# Altium PCB PCMCIA Type 2 Un-Shielded 15 Pin IO Connector(3).PCBDOC
Units mil, origin at the board's own origin, x right, y up, seen from the top; angles counter-clockwise.
Board outline 3047 x 1827 mil, 10 copper layers (TopLayer, MidLayer1, MidLayer2, MidLayer3, MidLayer4, MidLayer5, MidLayer6, MidLayer7, MidLayer8, BottomLayer); 2 components, 0 nets, 85 pads, 0 vias.
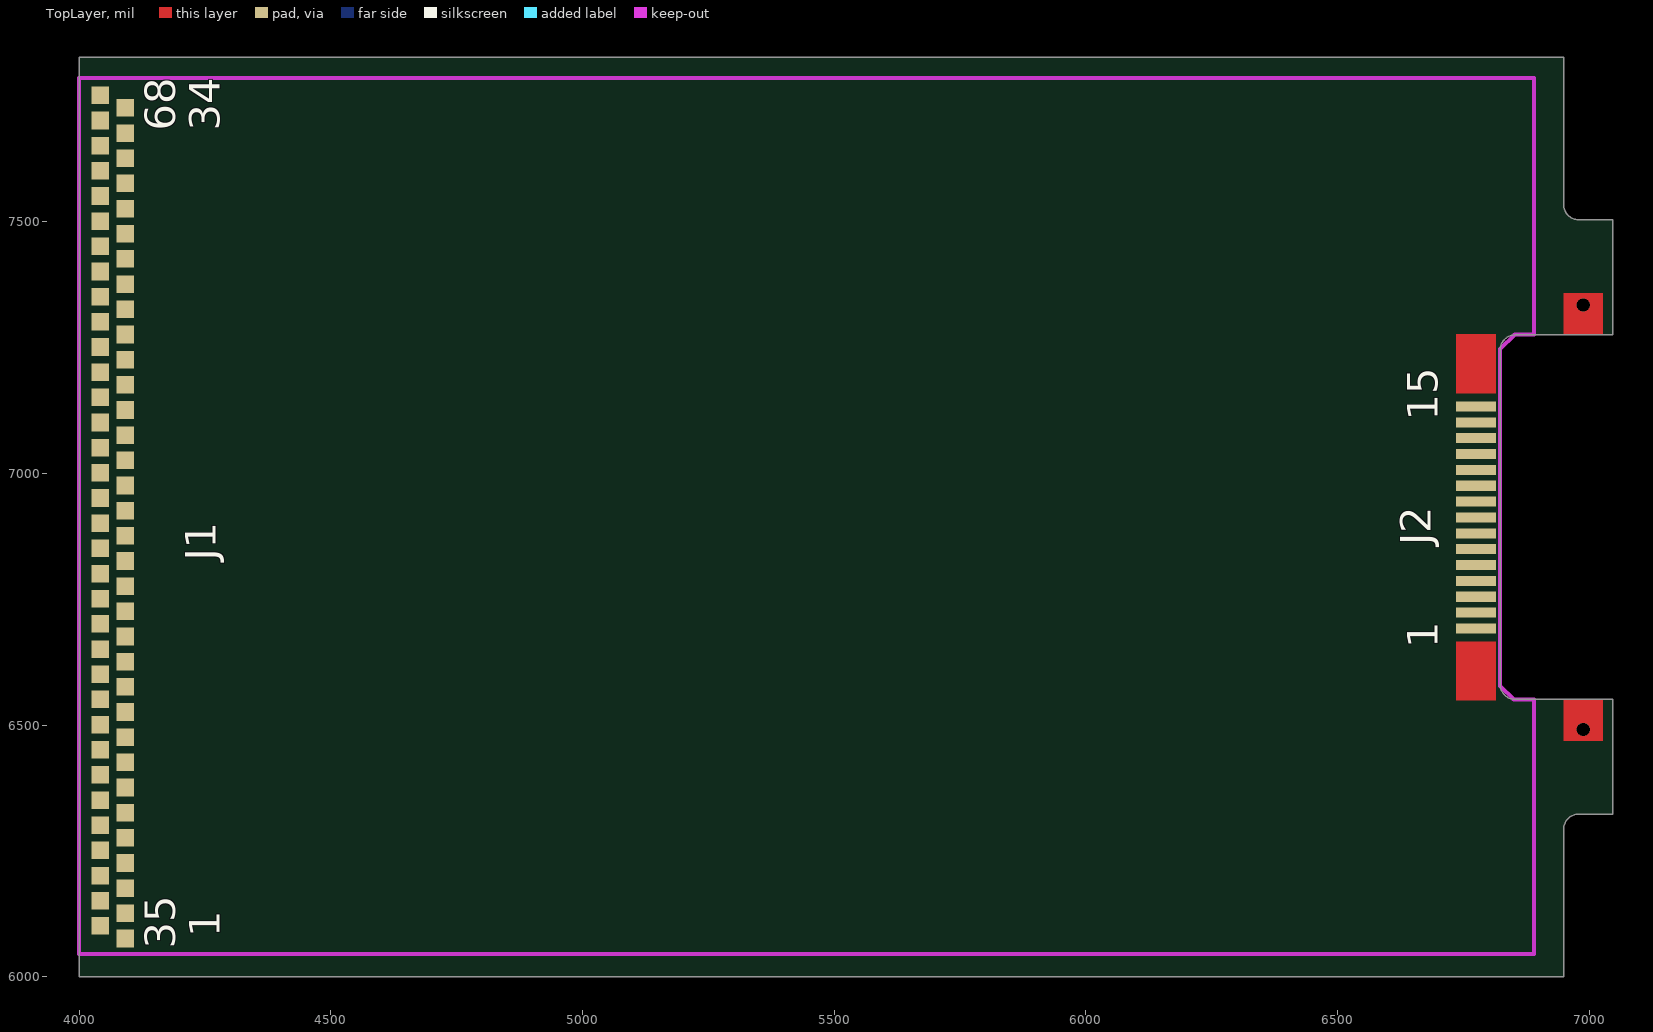
[diagram p0: TopLayer view]
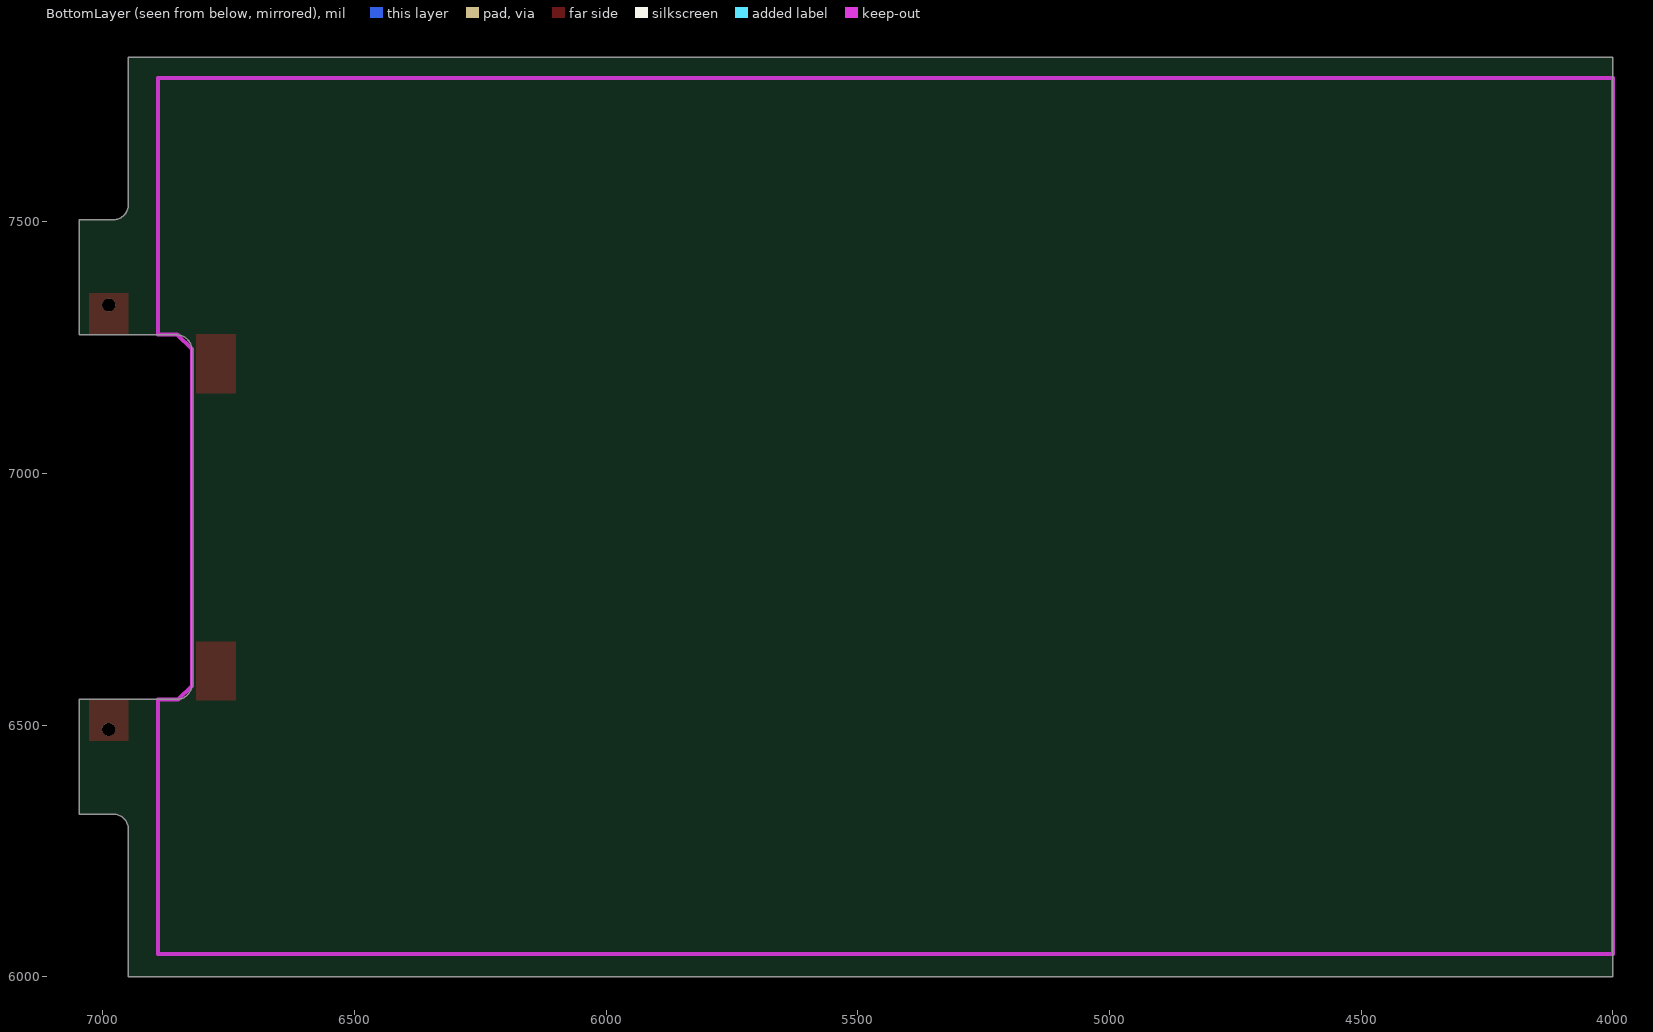
[diagram p1: BottomLayer view, seen from below]
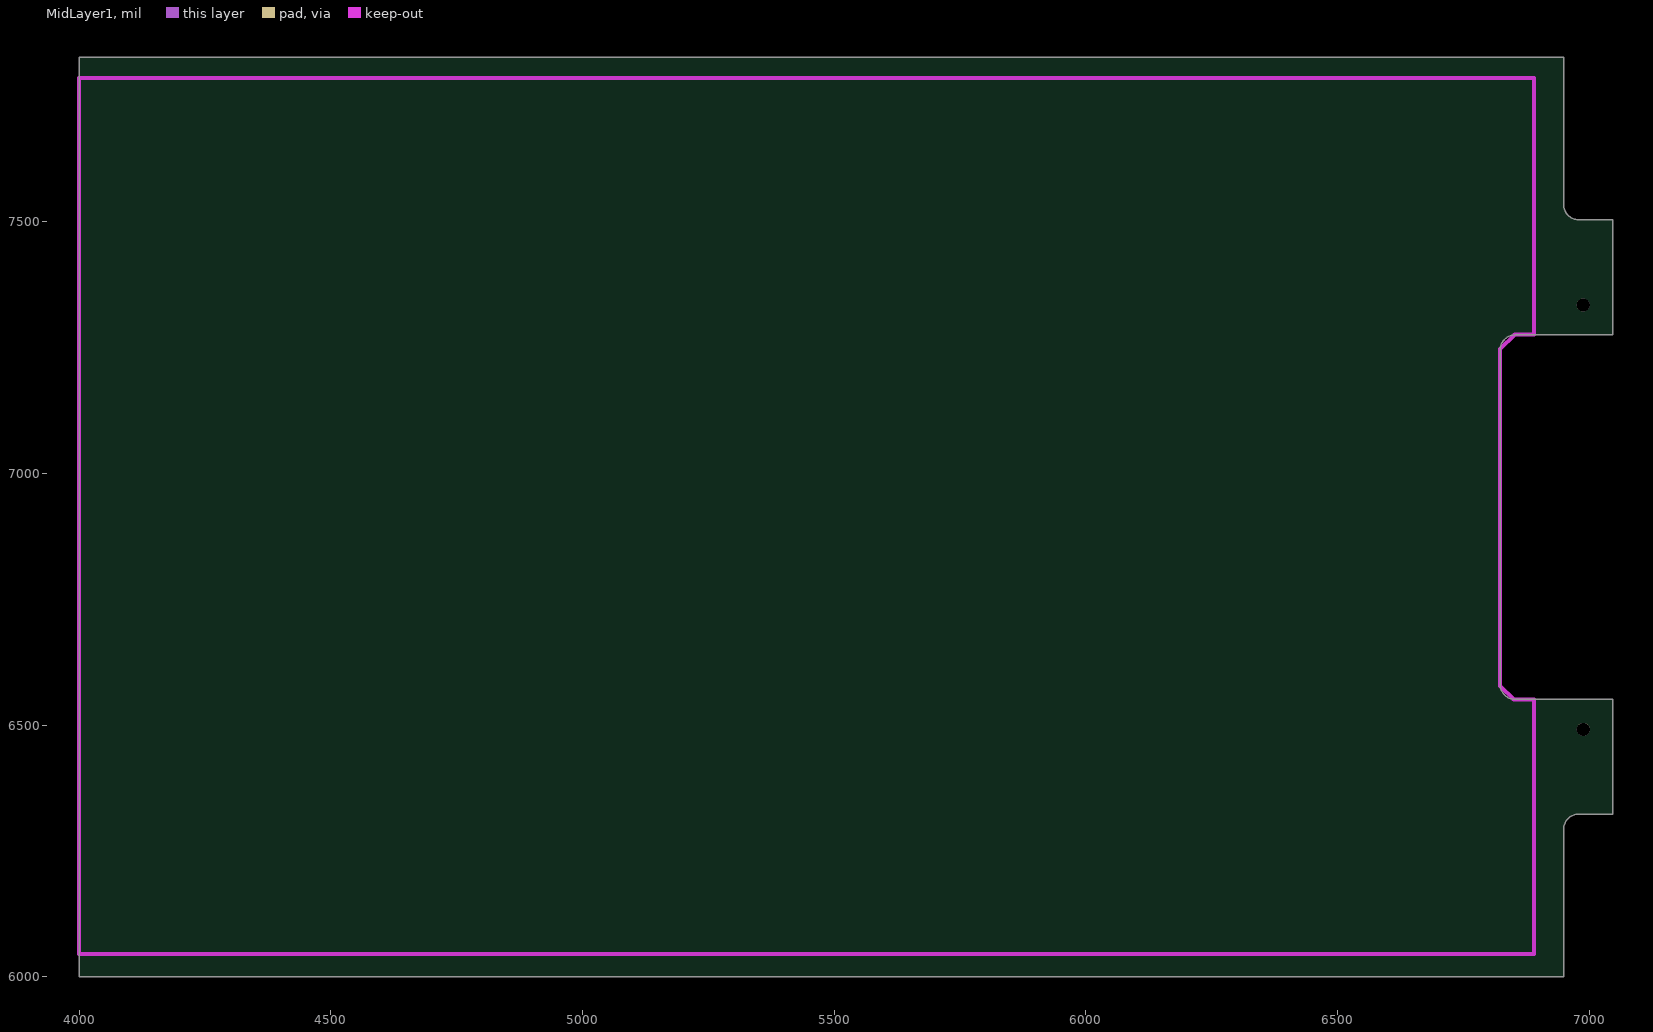
[diagram p2: MidLayer1]
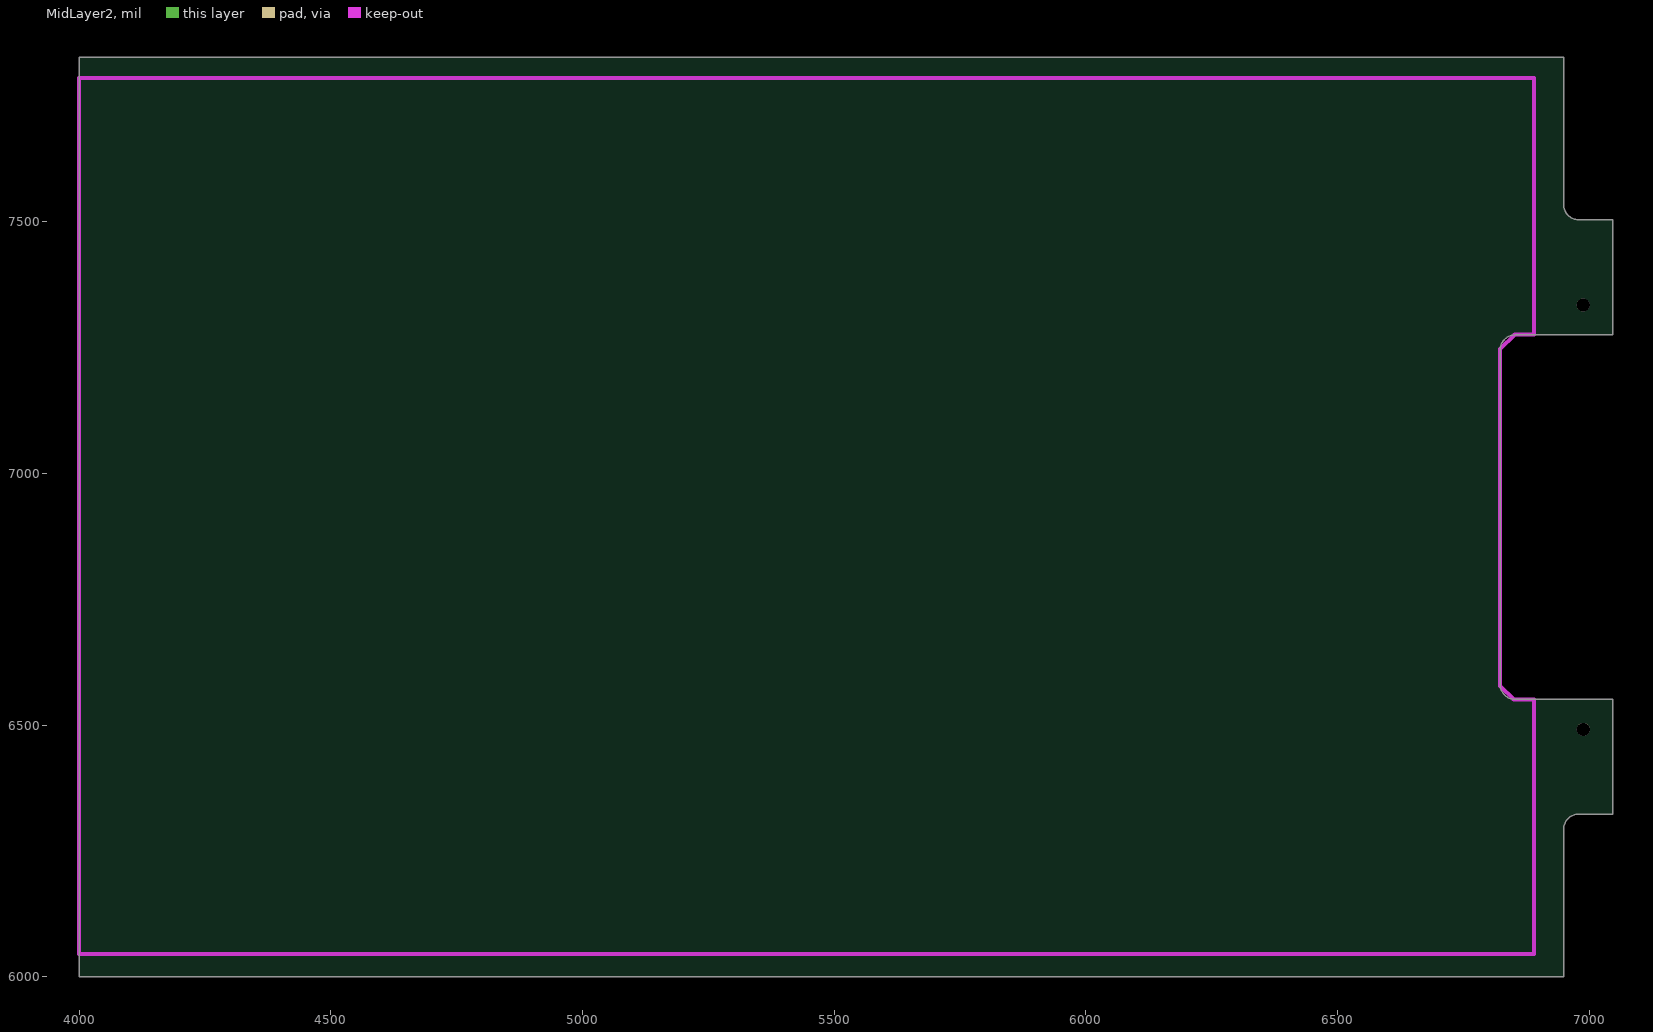
[diagram p3: MidLayer2]
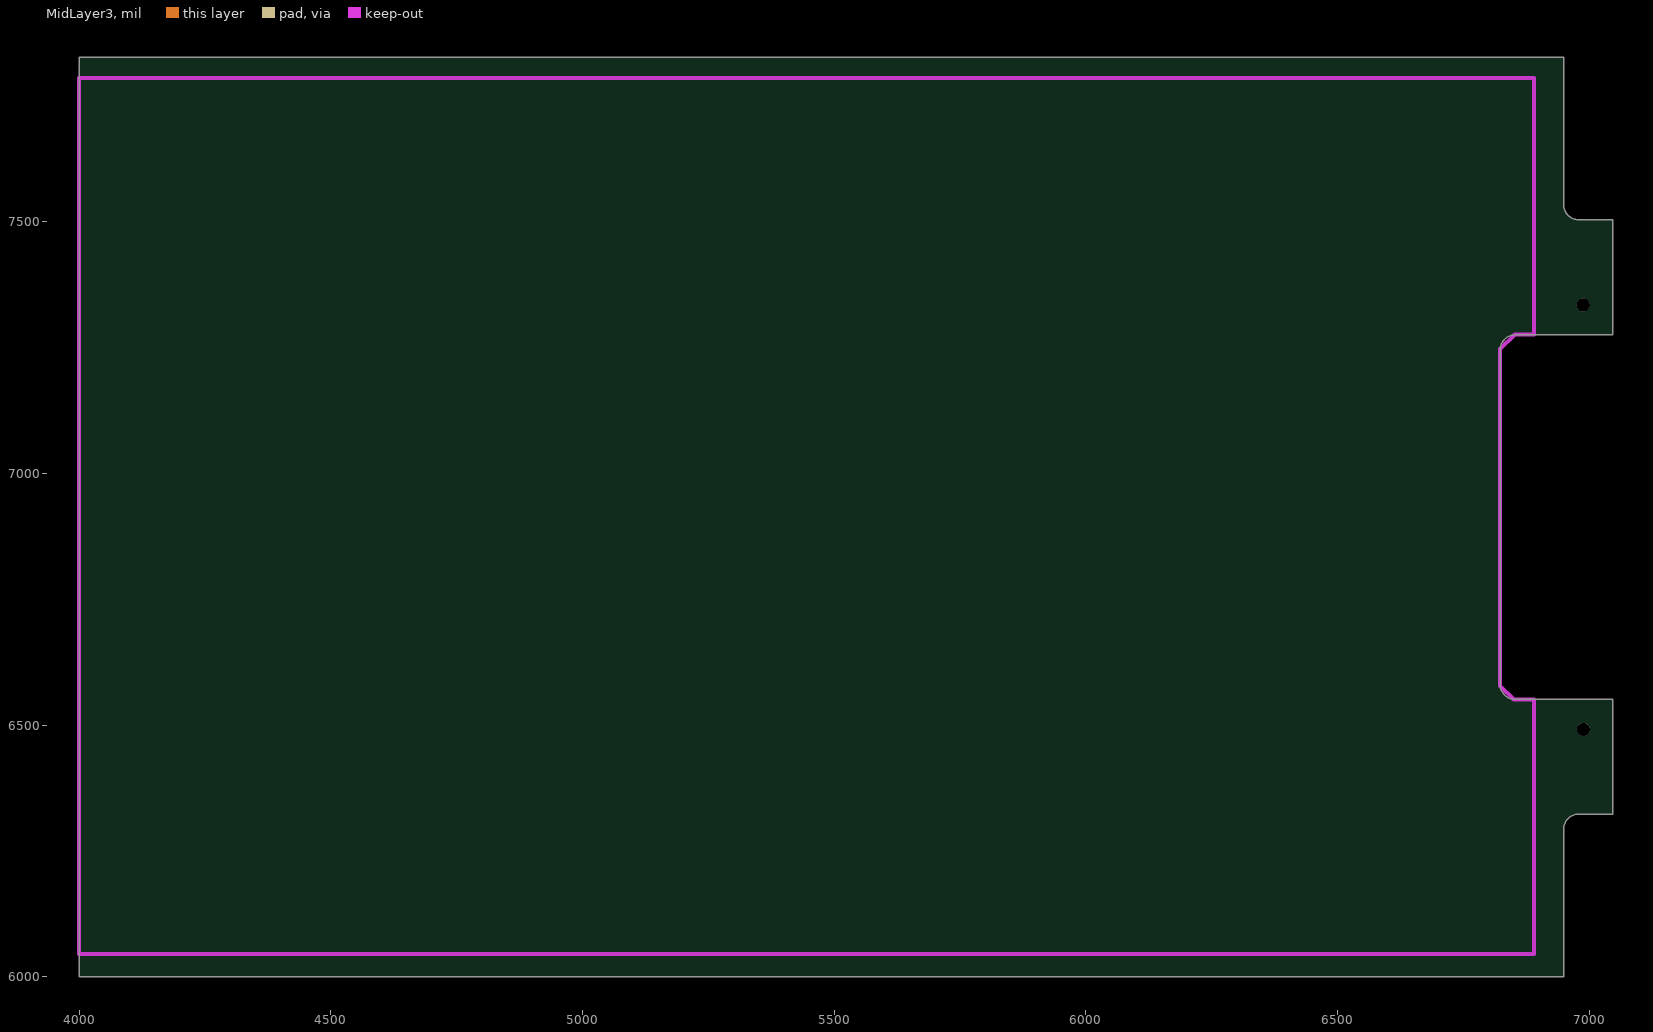
[diagram p4: MidLayer3]
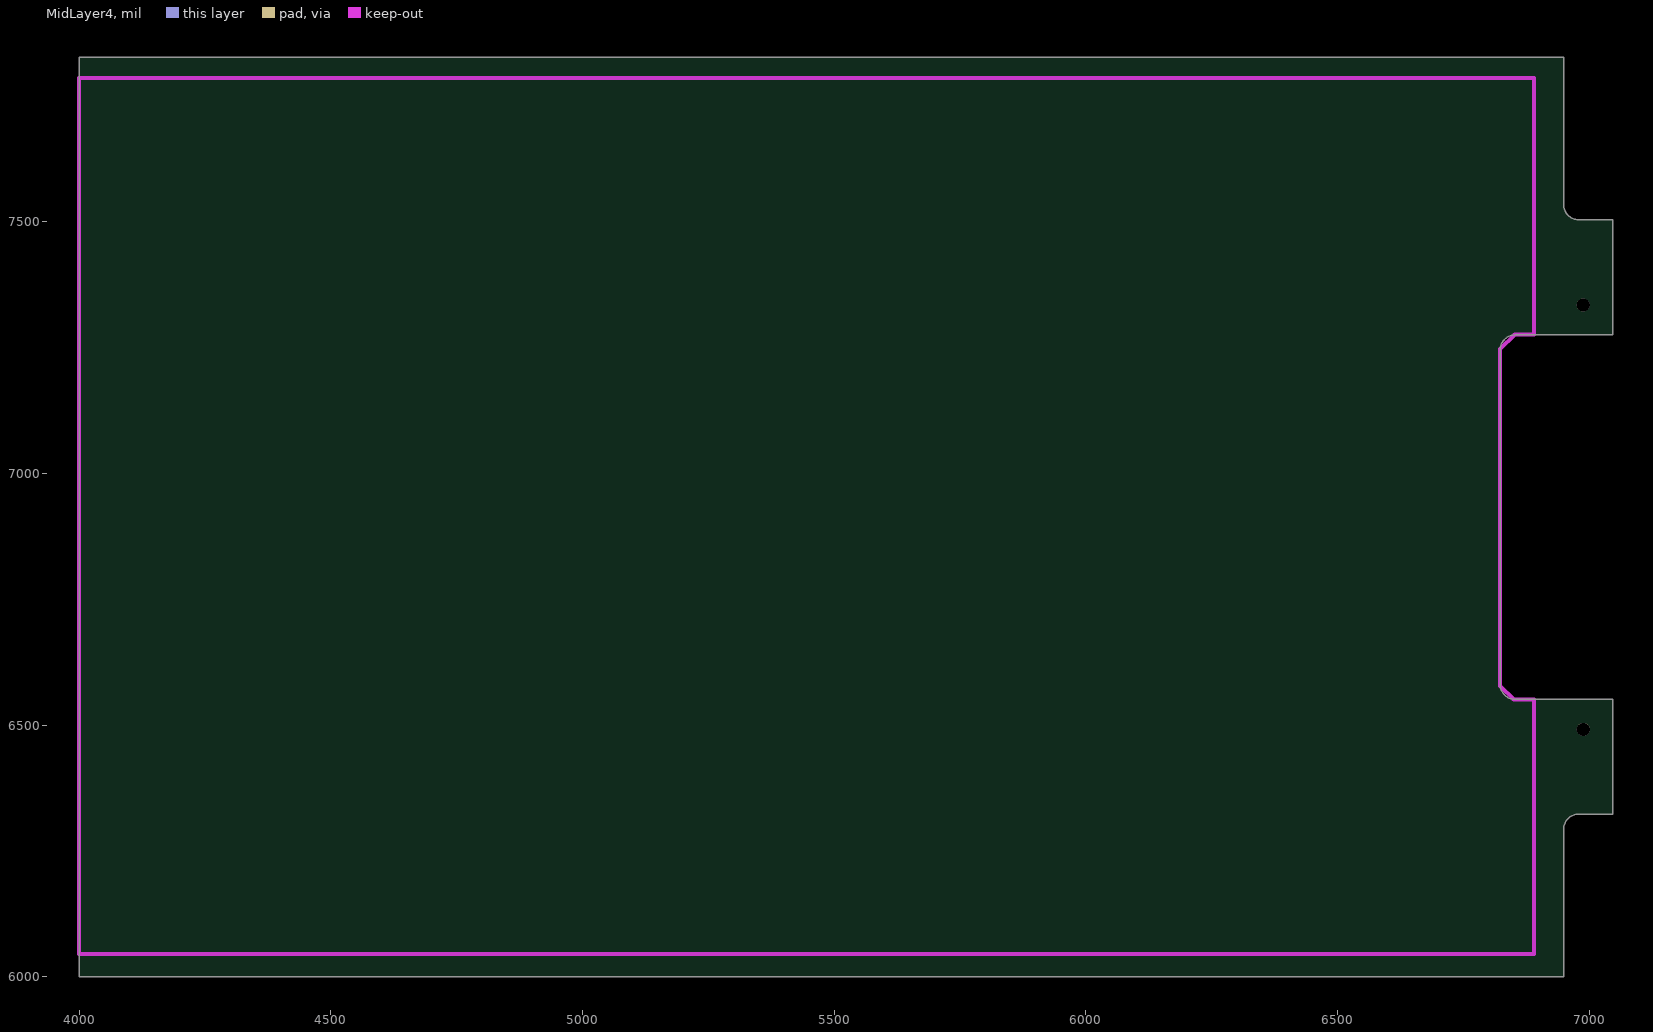
[diagram p5: MidLayer4]
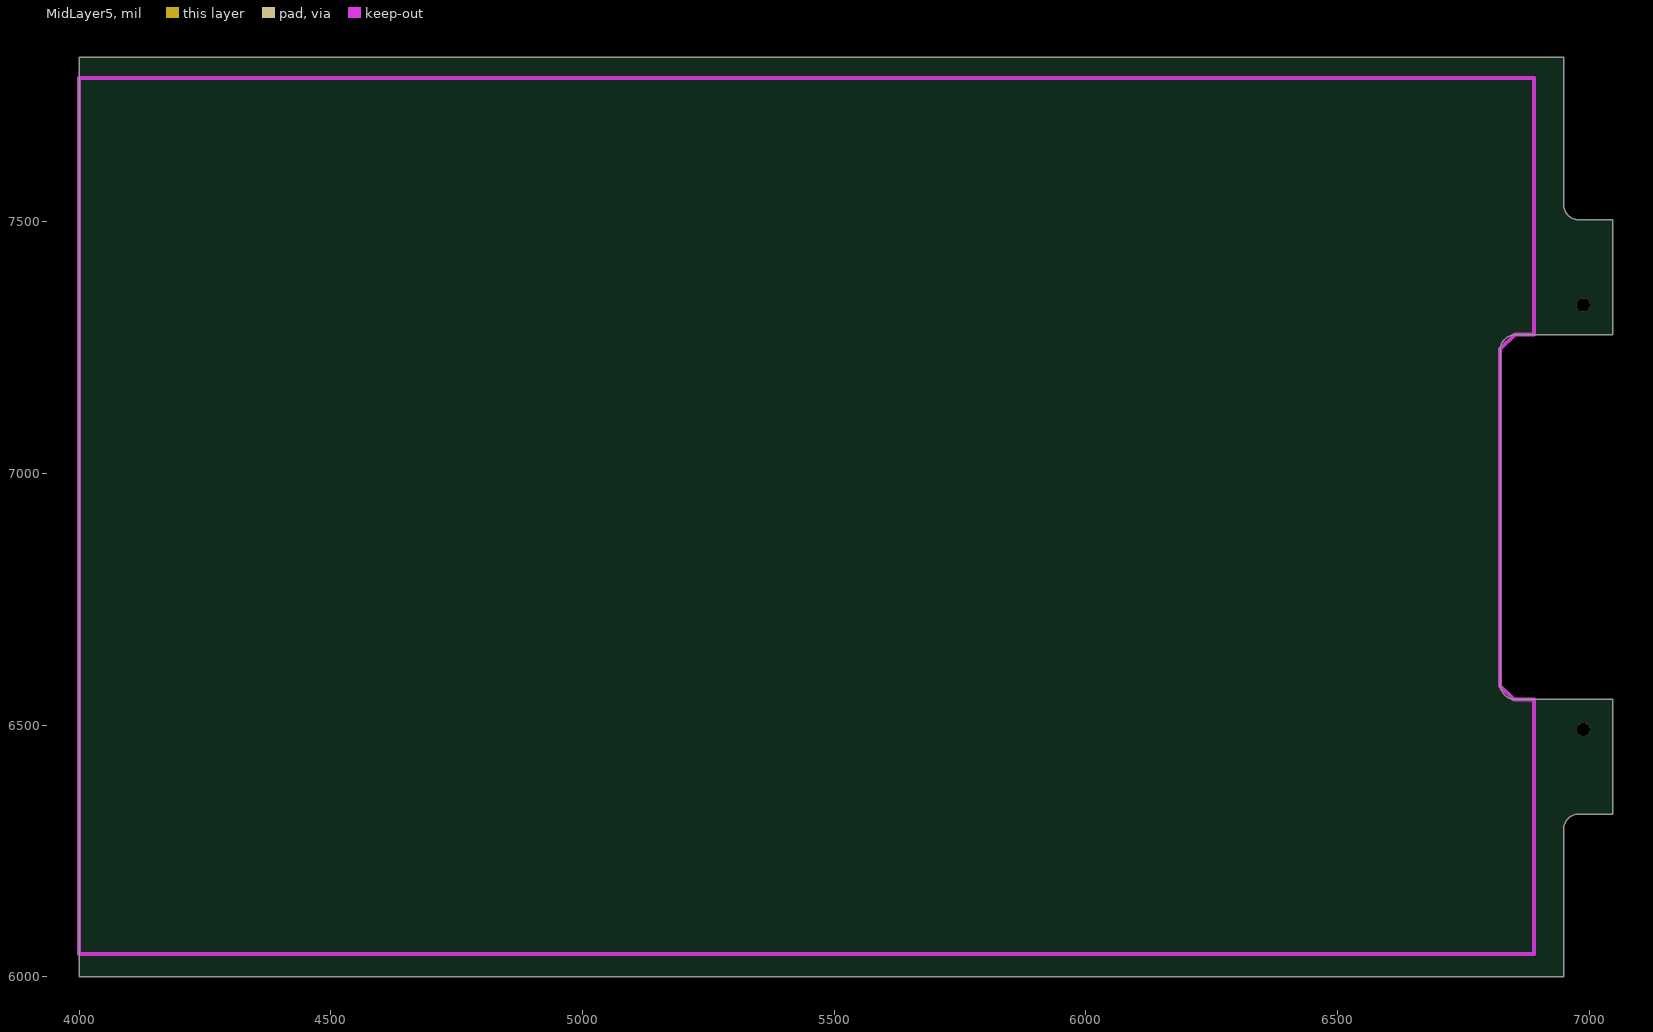
[diagram p6: MidLayer5]
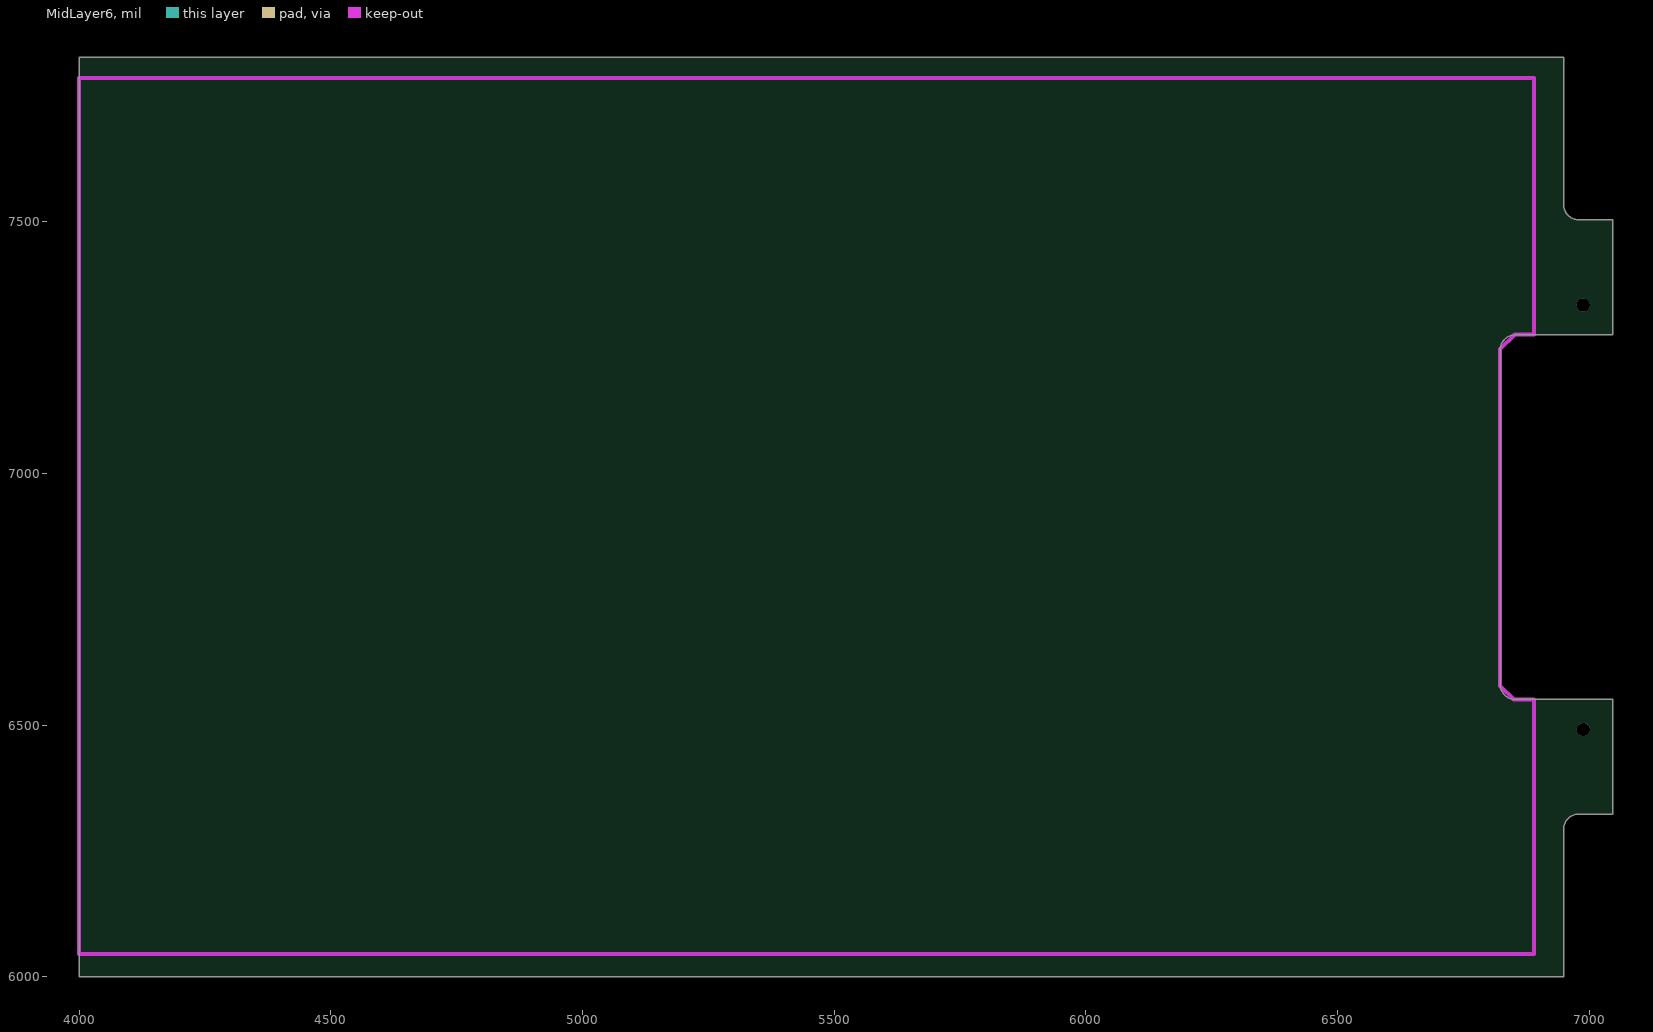
[diagram p7: MidLayer6]
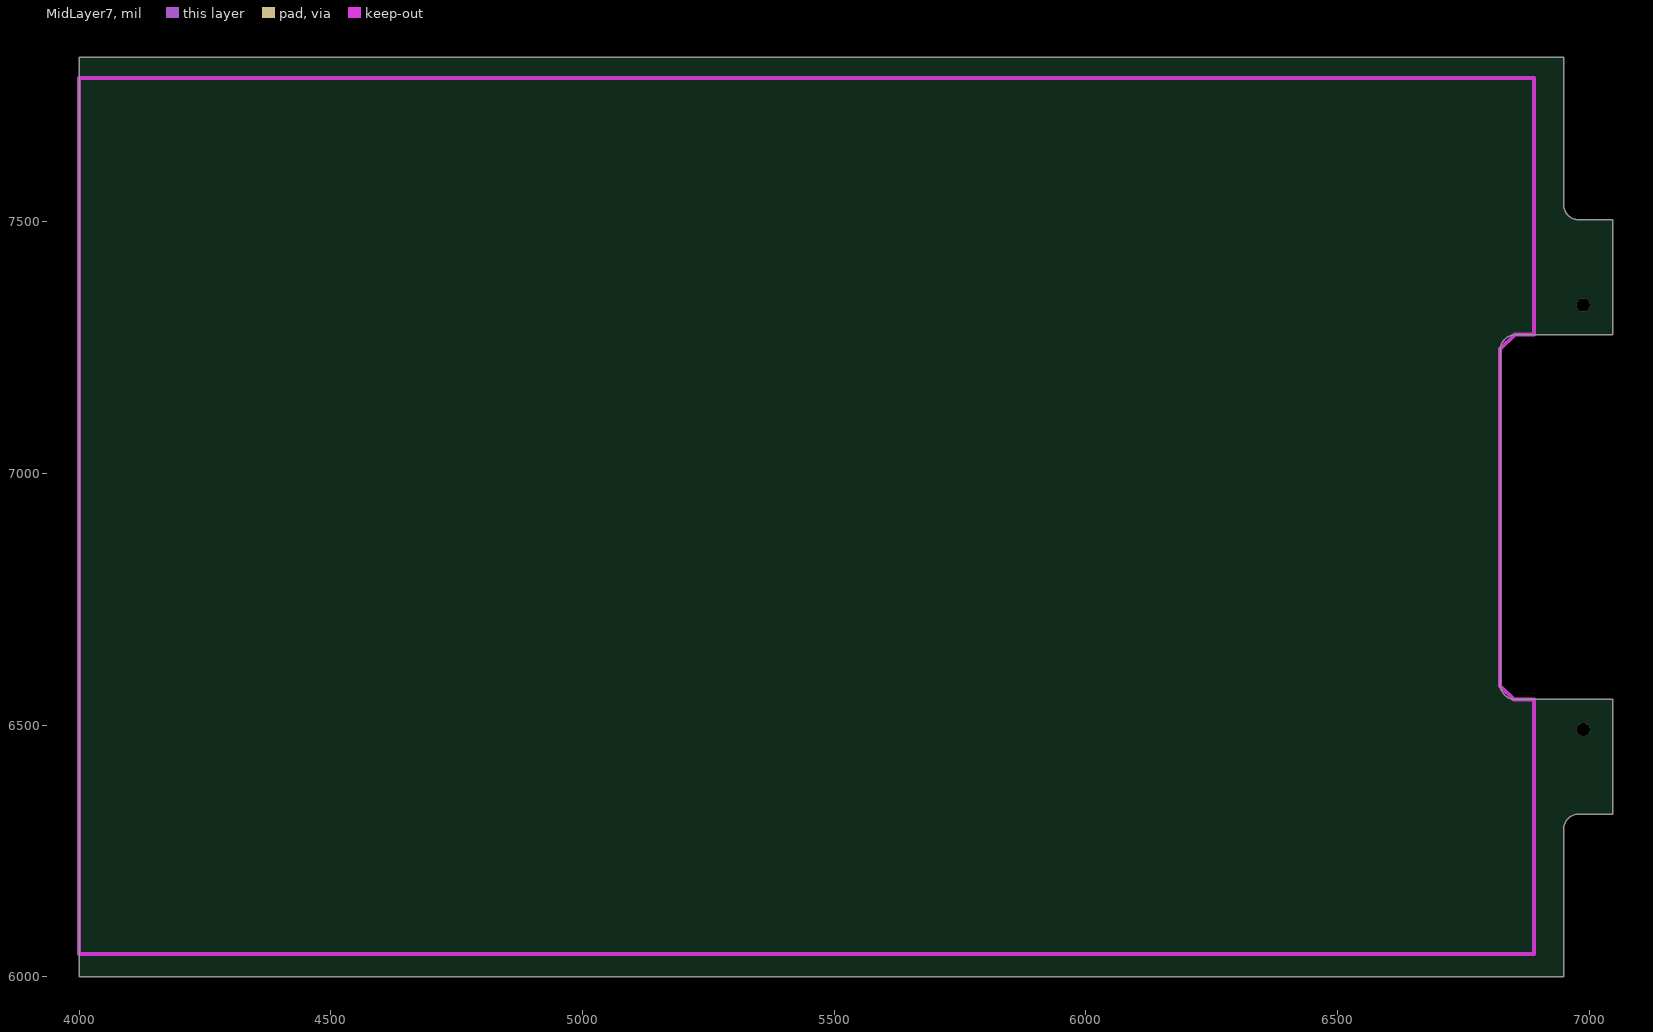
[diagram p8: MidLayer7]
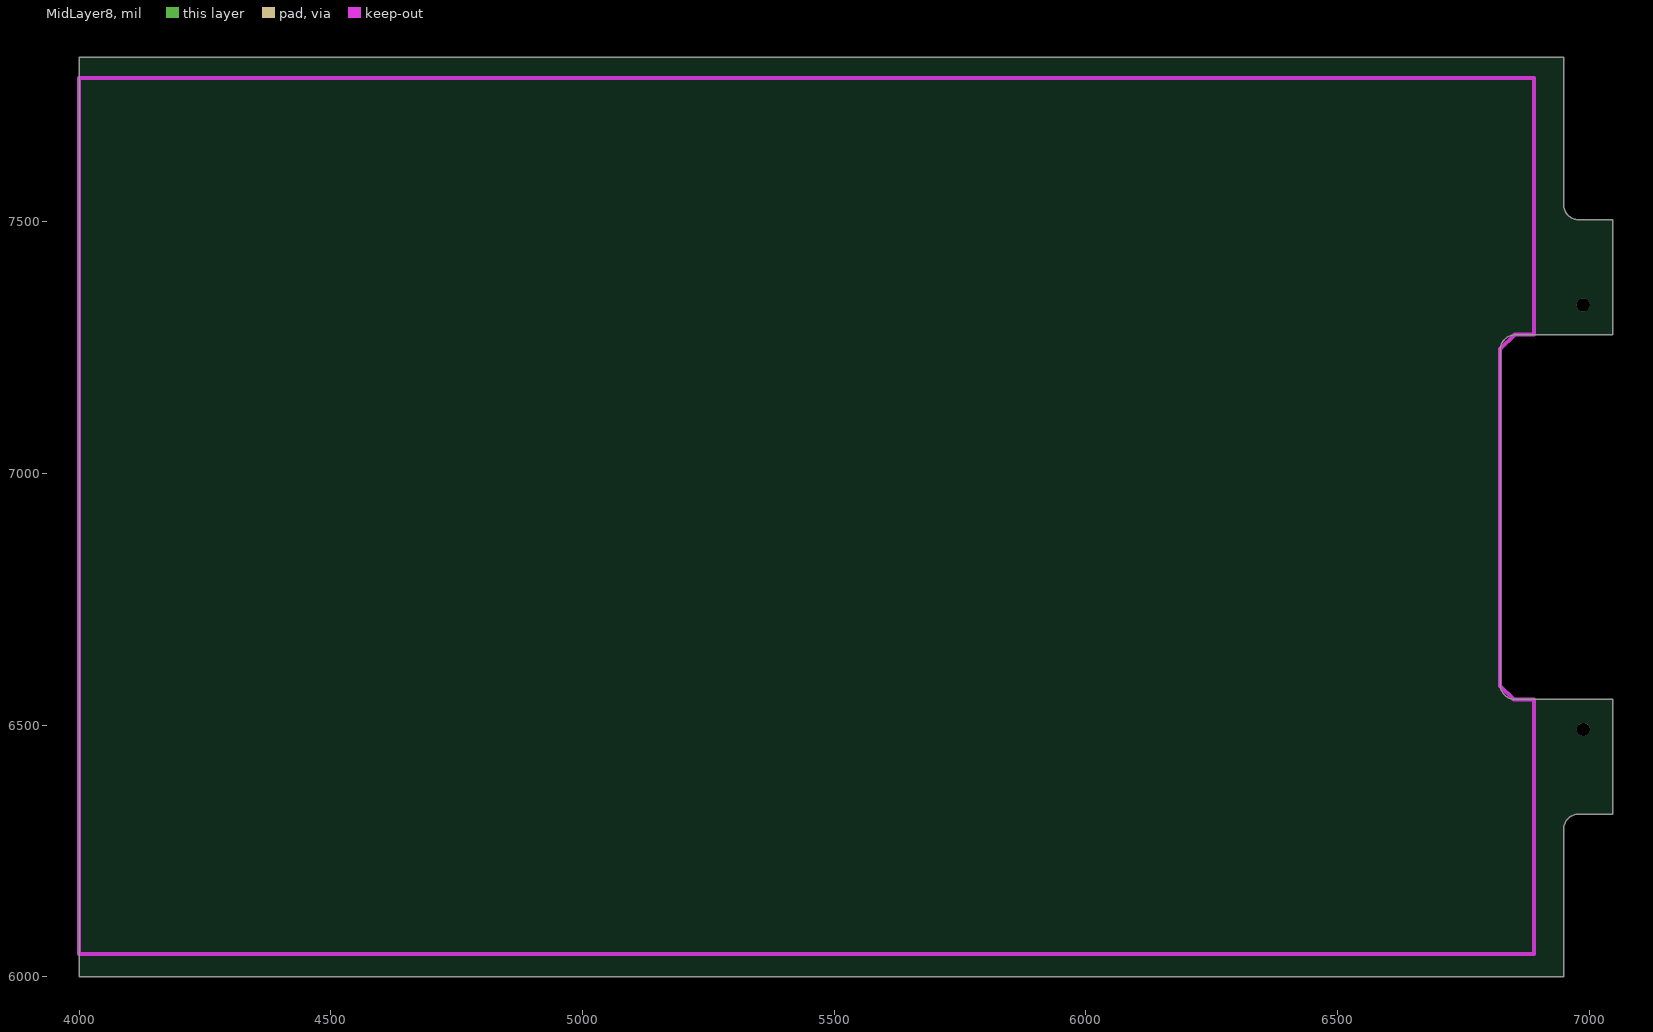
[diagram p9: MidLayer8]

## Layer stack, top to bottom
TopSolder: solder mask 0.4, Solder Resist, Dk 3.5
TopLayer: signal copper 1.4
Dielectric1: core 12.6, FR-4, Dk 4.8
MidLayer1: signal copper 1.4
Dielectric2: prepreg 12.6, FR-4, Dk 4.8
MidLayer2: signal copper 1.4
Dielectric3: core 12.6, FR-4, Dk 4.8
MidLayer3: signal copper 1.4
Dielectric4: prepreg 12.6, FR-4, Dk 4.8
MidLayer4: signal copper 1.4
Dielectric5: core 12.6, FR-4, Dk 4.8
MidLayer5: signal copper 1.4
Dielectric6: prepreg 12.6, FR-4, Dk 4.8
MidLayer6: signal copper 1.4
Dielectric7: core 12.6, FR-4, Dk 4.8
MidLayer7: signal copper 1.4
Dielectric8: prepreg 12.6, FR-4, Dk 4.8
MidLayer8: signal copper 1.4
Dielectric9: core 12.6, FR-4, Dk 4.8
BottomLayer: signal copper 1.4
BottomSolder: solder mask 0.4, Solder Resist, Dk 3.5

## Board outline
4000,6000 6949,6000 6949,6293.98 cw(c6979,6293) 6978.02,6323 7047,6323 7047,6551 6853,6551 cw(c6853,6581) 6823,6581 6823,7245 cw(c6853,7245) 6853,7275 7047,7275 7047,7504 6978.02,7504 cw(c6979,7534) 6949,7533.02 6949,7827 4000,7827

## Design rules (kind name [scope] priority, off if disabled: settings)
Clearance [All] p1: gap=10
FabricationTestPointUsage TestPointUsage [All] p1: valid=0 allowmultiple=FALSE
FabricationTestpoint Testpoint [All] p1: side=3 testpointundercomponent=TRUE minsize=40 maxsize=100 preferedsize=60 minholesize=20 maxholesize=40 preferedholesize=32 testpointgrid=1 allowsidetop=TRUE allowsidebottom=TRUE usegrid=TRUE gridtolerance=0.01
PlaneClearance [All] p1: clearance=10
PolygonConnect [All] p1: connectstyle=Relief reliefconductorwidth=10 reliefentries=4 polygonreliefangle="90 Angle" airgapwidth=10
RoutingVias [All] p1: holewidth=28 width=50 viastyle="Through Hole" minholewidth=28 minwidth=50 maxholewidth=28 maxwidth=50
SilkToSolderMaskClearance SilkscreenOverComponentPads [IsPad] p1: minsilkscreentomaskgap=10 clearancetoexposedcopper=TRUE
SolderMaskExpansion [All] p1: expansion=2
Width [All] p1: maxlimit=10 minlimit=10 preferedwidth=10
26 further rules are at their usual default settings.

## Components (designator, comment, footprint, x,y, rotation, side; value= is the part's Value field where it differs from the comment)
J1 "" PCMCIA68-2 4092,6076 r90 top locked
J2 "" PCMCIAII15_2 6775,6692 r90 top locked

## Footprints (in the part's own frame and the unit in brackets; to place one, negate y for a bottom-side part, rotate by r counter-clockwise, add the part's x,y. Pads: shape width x height; smd on the part's side, far side on the other; paste and mask are expansions set on the pad)
PCMCIA68-2 [mil]
  rect 35x35 smd: 1(0,0) 2(50,0) 3(100,0) 4(150,0) 5(200,0) 6(250,0) 7(300,0) 8(350,0) 9(400,0) 10(450,0) 11(500,0) 12(550,0) 13(600,0) 14(650,0) 15(700,0) 16(750,0) 17(800,0) 18(850,0) 19(900,0) 20(950,0) 21(1000,0) 22(1050,0) 23(1100,0) 24(1150,0) 25(1200,0) 26(1250,0) 27(1300,0) 28(1350,0) 29(1400,0) 30(1450,0) 31(1500,0) 32(1550,0) 33(1600,0) 34(1650,0) 35(25,50) 36(75,50) 37(125,50) 38(175,50) 39(225,50) 40(275,50) 41(325,50) 42(375,50) 43(425,50) 44(475,50) 45(525,50) 46(575,50) 47(625,50) 48(675,50) 49(725,50) 50(775,50) 51(825,50) 52(875,50) 53(925,50) 54(975,50) 55(1025,50) 56(1075,50) 57(1125,50) 58(1175,50) 59(1225,50) 60(1275,50) 61(1325,50) 62(1375,50) 63(1425,50) 64(1475,50) 65(1525,50) 66(1575,50) 67(1625,50) 68(1675,50)
PCMCIAII15_2 [mil]
  rect 20x79 smd: 1(0,0) 2(31.5,0) 3(63,0) 4(94.5,0) 5(126,0) 6(157.5,0) 7(189,0) 8(220.5,0) 9(252,0) 10(283.5,0) 11(315,0) 12(346.5,0) 13(378,0) 14(409.5,0) 15(441,0)
  round 26 hole 26: G1(-200.5,-213) G2(642.5,-213)
  TopLayer region: 466.5,39.5 466.5,-39.5 584.5,-39.5 584.5,39.5
  TopLayer region: -143.5,39.5 -143.5,-39.5 -25.5,-39.5 -25.5,39.5
  TopLayer region: 582.5,-173.5 582.5,-252.5 666,-252.5 666,-173.5
  TopLayer region: -224,-173.5 -224,-252.5 -141.5,-252.5 -141.5,-173.5

## Nets (pads, with @x,y where several pads share a name; then routed paths per layer and width w, separated by ;. In a path a pad name is that pad's centre, name@x,y a point inside that pad or via, vN(x,y) a via of type N, cw(c..) or ccw(c..) an arc to the next point about the centre after c; other vN are vias at no path point)
pads on no net: J1.1 J1.2 J1.3 J1.4 J1.5 J1.6 J1.7 J1.8 J1.9 J1.10 J1.11 J1.12 J1.13 J1.14 J1.15 J1.16 J1.17 J1.18 J1.19 J1.20 J1.21 J1.22 J1.23 J1.24 J1.25 J1.26 J1.27 J1.28 J1.29 J1.30 J1.31 J1.32 J1.33 J1.34 J1.35 J1.36 J1.37 J1.38 J1.39 J1.40 J1.41 J1.42 J1.43 J1.44 J1.45 J1.46 J1.47 J1.48 J1.49 J1.50 J1.51 J1.52 J1.53 J1.54 J1.55 J1.56 J1.57 J1.58 J1.59 J1.60 J1.61 J1.62 J1.63 J1.64 J1.65 J1.66 J1.67 J1.68 J2.1 J2.2 J2.3 J2.4 J2.5 J2.6 J2.7 J2.8 J2.9 J2.10 J2.11 J2.12 J2.13 J2.14 J2.15 J2.G1 J2.G2

## Keep-outs
KeepOutLayer:
  lines w8: 4000,6045 4000,7785 6890,7785 6890,7276 6852,7276 6823,7247 6823,6578 6850,6551 6890,6551 6890,6045 4000,6045

## Other copper
TopLayer:
  text ".GTL" at 6651,7930 h90
MidLayer1:
  text ".G1" at 6651,7930 h90
MidLayer2:
  text ".G2" at 6651,7930 h90
MidLayer3:
  text ".G3" at 6651,7930 h90
MidLayer4:
  text ".G4" at 6651,7930 h90
MidLayer5:
  text ".G5" at 6651,7930 h90
MidLayer6:
  text ".G6" at 6651,7930 h90
MidLayer7:
  text ".G7" at 6651,7930 h90
MidLayer8:
  text ".G8" at 6651,7930 h90
BottomLayer:
  text "P/N XXXXXX-XXX REV A" at 5371,8290 h75
  text ".GBL" at 6651,7930 h90

## Silkscreen, mask and mechanical layers (free items; w line width, h text height)
TopOverlay:
  rectangle: 4332,8493 5082,8693
  rectangle: 4332,8783 5082,8983
  lines w10: 5443.59,8885.97 ccw(c5492,8925.5) 5443.71,8885.83
  text "C" at 5547,8888 h60
  text "2002 COMPANY NAME" at 5697,8888 h75
  text "S/N" at 4082,8840.5 h75
  text "BOARD NAME" at 5547,8713 h75
  text "ASSY NO.: XXXXXX" at 5547,8563 h75
  text "REV" at 4082,8543 h75
  text ".GTO" at 6651,7930 h90
TopPaste:
  text ".GTP" at 6651,7930 h90
BottomPaste:
  text ".GBP" at 6651,7930 h90
TopSolder:
  text ".GTS" at 6651,7930 h90
BottomSolder:
  text ".GBS" at 6651,7930 h90
Mechanical1:
  lines w8: 6823,6580.5 6823,7247 ; 6823,6581 ccw(c6853,6581) 6853,6551 ; 6823,7245 cw(c6853,7245) 6853,7275 ; 6851,6551 7047,6551 7047,6323 6977,6323 ; 6851,7275 7047,7275 7047,7504 6977,7504 ; 6948.98,6293 cw(c6979,6293) 6979,6323.02 ; 6949,6295 6949,6000 4000,6000 4000,7827 6949,7827 6949,7532 ; 6948.98,7534 ccw(c6979,7534) 6979,7503.98
Mechanical4:
  text ".Pcb_File_Name_No_Path" at 4751,8120 h90
  text ".Printout_Name" at 4751,7930 h90
  text "NOTE:" at 7151,6300 h50
  text "68 Pin Conn. : AMP 146229-1 or 146322-1" at 7151,6230 h50
  text "15 Pin Conn. : AMP 558289-1 or -2" at 7151,6150 h50
  text "Frame : AMP 558135-1, -2, -3, -4" at 7151,6075 h50
DrillDrawing:
  text ".LEGEND" at 7184,7030 h90
  text "Drilling Details." at 7184,6830 h90

## Dimensions
4000,6000 to 6820,5980 on Mechanical4
4000,6000 to 3980,6322 on Mechanical4

## Text inside footprints (layer, text, board x,y; h text height)
J1: TopOverlay "35" at 4191.5,6056 h60 r90; TopOverlay "1" at 4279,6078.5 h60 r90; TopOverlay "34" at 4279,7681 h60 r90; TopOverlay "68" at 4191.5,7681 h60 r90
J2: TopOverlay "15" at 6699,7105 h60 r90; TopOverlay "1" at 6699,6652.5 h60 r90